# Altium PCB base_tiempo.PcbDoc
Units mil, origin at the board's own origin, x right, y up, seen from the top; angles counter-clockwise.
Board outline 6000 x 4000 mil, 2 copper layers (Top Layer, Bottom Layer); 15 components, 22 nets, 88 pads, 0 vias.
Unrouted connection lines stored in the file: 51.
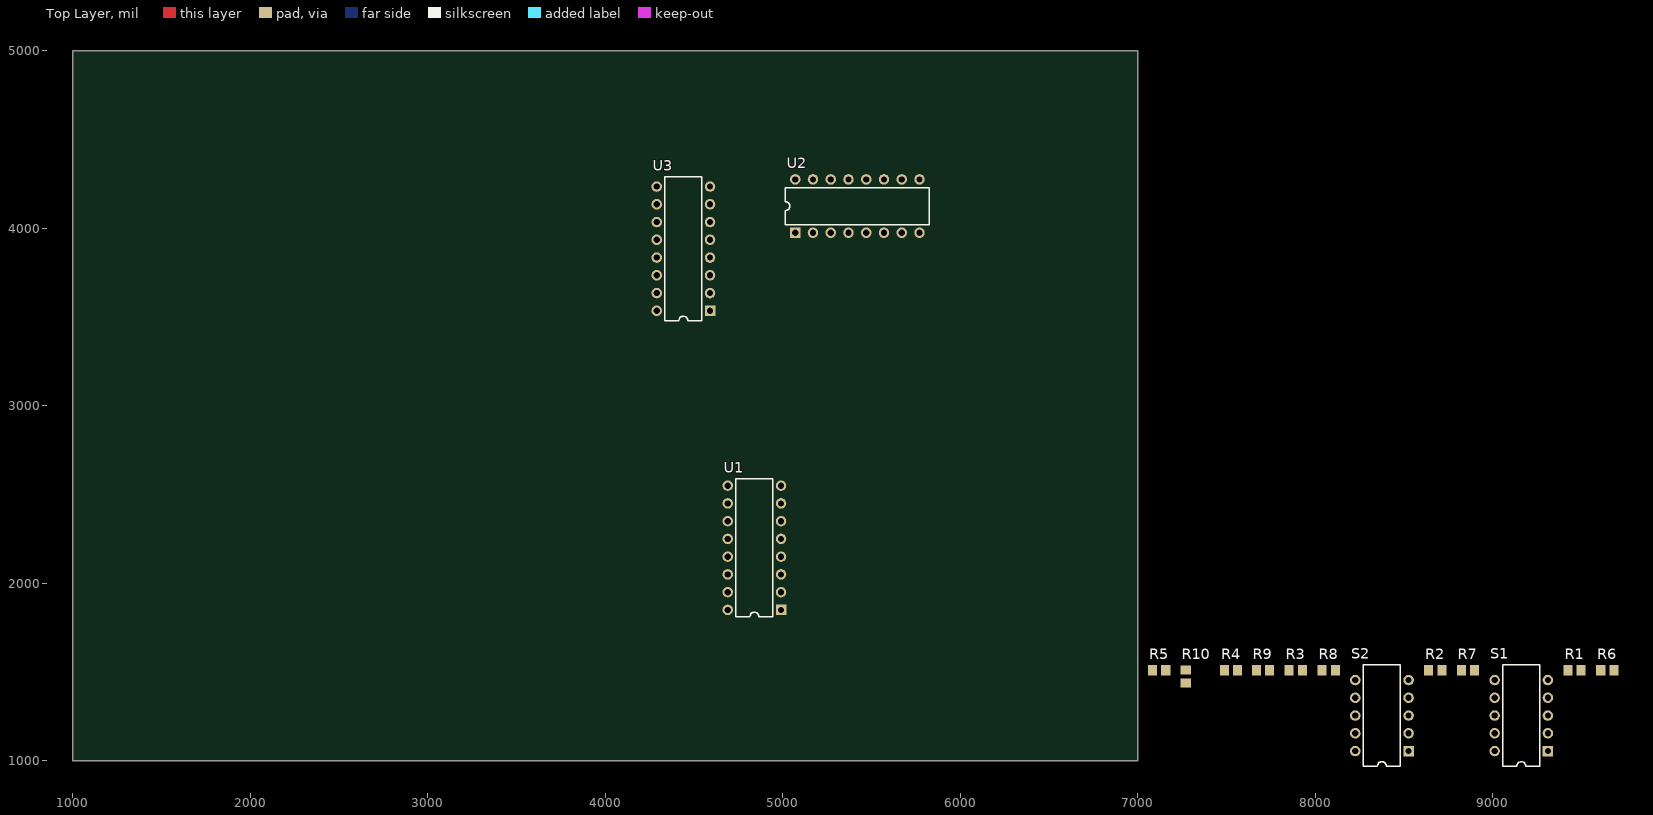
[diagram p0: Top Layer view]
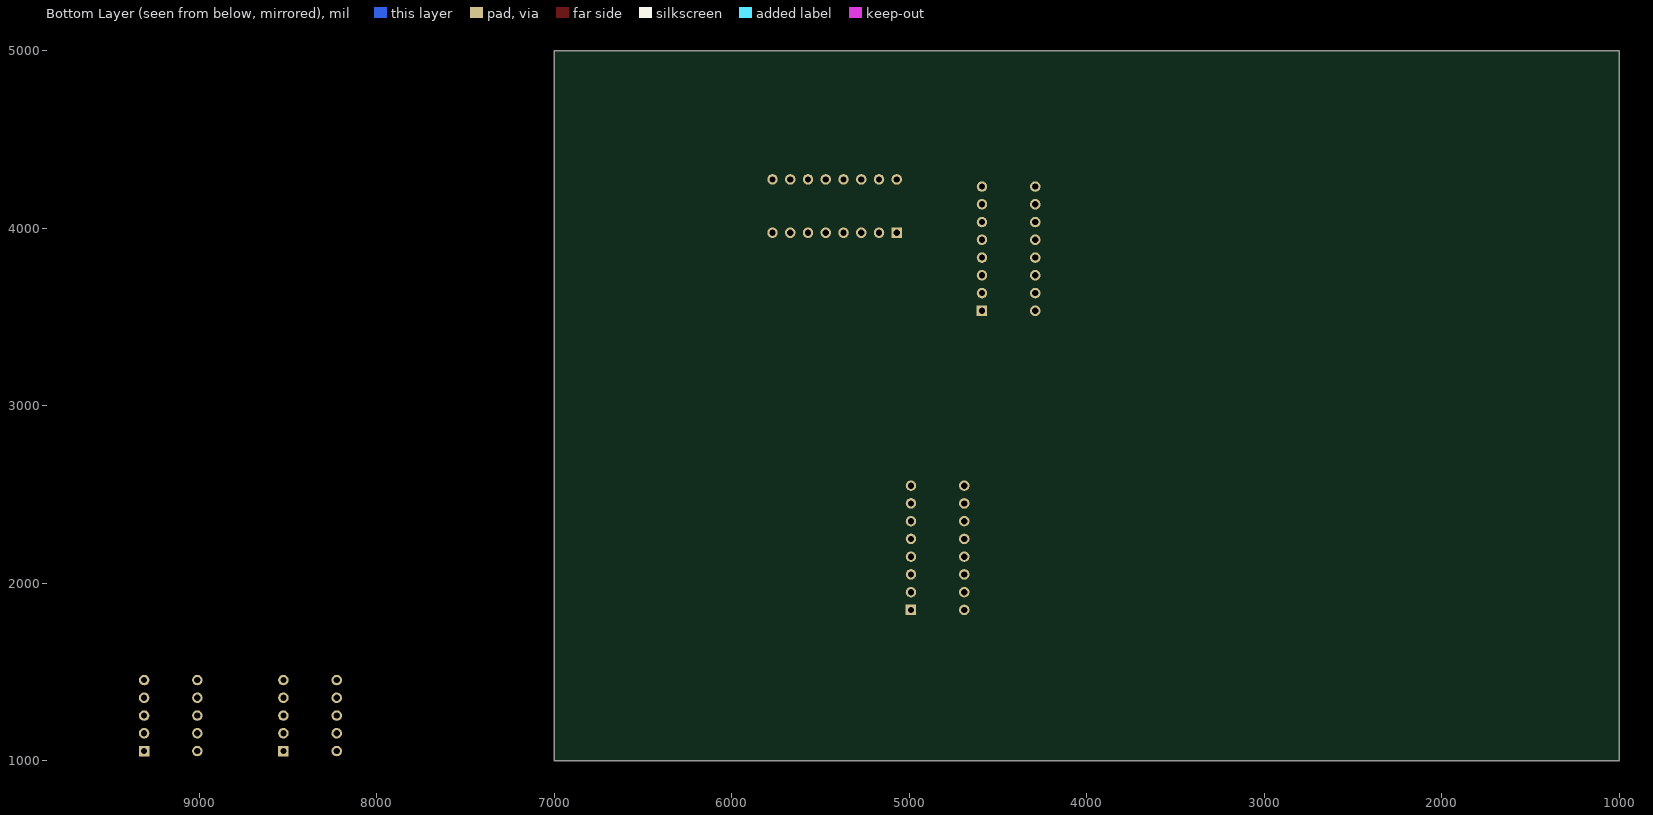
[diagram p1: Bottom Layer view, seen from below]

## Layer stack, top to bottom
Top Layer: signal copper 1.4
Dielectric: dielectric 12.6, FR-4, Dk 4.8
Bottom Layer: signal copper 1.4

## Board outline
1000,1000 7000,1000 7000,5000 1000,5000

## Design rules (kind name [scope] priority, off if disabled: settings)
Clearance [All] p1: gap=10
PolygonConnect [All] p1: connectstyle=Relief reliefconductorwidth=10 reliefentries=4 polygonreliefangle="90 Angle"
RoomDefinition Selector [InComponentClass('Selector')] p1: confinementstyle=ConfineIn formatcopy=TRUE lockcomponents=FALSE outline 7045,960 9720,960 9720,1650 7045,1650
RoomDefinition Buffer_5Bits [InComponentClass('Buffer_5Bits')] p2: confinementstyle=ConfineIn formatcopy=TRUE lockcomponents=FALSE outline 520,1105 2520,1105 2520,2105 520,2105
RoomDefinition base_tiempo [InComponentClass('base_tiempo')] p3: confinementstyle=ConfineIn formatcopy=TRUE lockcomponents=FALSE outline 7045,960 7845,960 7845,1860 7045,1860
RoutingVias [All] p1: holewidth=28 width=50 viastyle="Through Hole" minholewidth=28 minwidth=50 maxholewidth=28 maxwidth=50
SilkscreenOverComponentPads [All] p1: minsilkscreentomaskgap=10
SolderMaskExpansion [All] p1: expansion=4
TestPointUsage [All] p1: valid=0 allowmultiple=FALSE
Testpoint [All] p1: side=15 testpointundercomponent=TRUE minsize=40 maxsize=100 preferedsize=60 minholesize=0 maxholesize=40 preferedholesize=32 testpointgrid=1 style=1023 order=0-112345678
Width [All] p1: maxlimit=10 minlimit=10 preferedwidth=10
23 further rules are at their usual default settings.

## Classes and differential pairs
component class base_tiempo: U1
component class Buffer_5Bits: U2 U3
component class Selector: R1 R2 R3 R4 R5 R6 R7 R8 R9 R10 S1 S2

## Components (designator, comment, footprint, x,y, rotation, side; value= is the part's Value field where it differs from the comment)
R1 "Res Semi" 2012[0805] 9460,1510 r0 top
R2 "Res Semi" 2012[0805] 8675,1510 r0 top
R3 "Res Semi" 2012[0805] 7890,1510 r0 top
R4 "Res Semi" 2012[0805] 7525,1510 r0 top
R5 "Res Semi" 2012[0805] 7120,1510 r0 top
R6 "Res Semi" 2012[0805] 9645,1510 r0 top
R7 "Res Semi" 2012[0805] 8860,1510 r0 top
R8 "Res Semi" 2012[0805] 8075,1510 r0 top
R9 "Res Semi" 2012[0805] 7705,1510 r0 top
R10 "Res Semi" 2012[0805] 7270,1475 r90 top
S1 "SW DIP-5" N10A 9160,1255 r90 top
S2 "SW DIP-5" N10A 8375,1255 r90 top
U1 "SN74HC4040N" N016 4840,2200 r90 top
U2 "M54HC4050F1R" DIP16 5420,4125 r0 top
U3 "M54HC4049F1R" DIP16 4440,3885 r90 top

## Footprints (in the part's own frame and the unit in brackets; to place one, negate y for a bottom-side part, rotate by r counter-clockwise, add the part's x,y. Pads: shape width x height; smd on the part's side, far side on the other; paste and mask are expansions set on the pad)
2012[0805] [mm] "Chip Resistor; Body 2.0 x 1.3 mm (LxW typ)"
  rect 1.3x1.5 smd: 1(-0.95,0) 2(0.95,0)
DIP16 [mm] "DIP; 16 Leads; Row Spacing 7.62 mm; Pitch 2.54 mm"
  rect 1.5x1.5 hole 0.9: 1(-8.89,-3.81)
  round 1.5 hole 0.9: 2(-6.35,-3.81) 3(-3.81,-3.81) 4(-1.27,-3.81) 5(1.27,-3.81) 6(3.81,-3.81) 7(6.35,-3.81) 8(8.89,-3.81) 9(8.89,3.81) 10(6.35,3.81) 11(3.81,3.81) 12(1.27,3.81) 13(-1.27,3.81) 14(-3.81,3.81) 15(-6.35,3.81) 16(-8.89,3.81)
  silkscreen extent -10.3,-2.65 10.3,2.65
N10A [mm] "DIP; 10 Leads; Row Spacing 7.62 mm; Pitch 2.54 mm"
  rect 1.5x1.5 hole 0.9: 1(-5.08,-3.81)
  round 1.5 hole 0.9: 2(-2.54,-3.81) 3(0,-3.81) 4(2.54,-3.81) 5(5.08,-3.81) 6(5.08,3.81) 7(2.54,3.81) 8(0,3.81) 9(-2.54,3.81) 10(-5.08,3.81)
  silkscreen extent -7.25,-2.65 7.25,2.65
N016 [mm] "DIP; 16 Leads; Row Spacing 7.62 mm; Pitch 2.54 mm"
  rect 1.5x1.5 hole 0.9: 1(-8.89,-3.81)
  round 1.5 hole 0.9: 2(-6.35,-3.81) 3(-3.81,-3.81) 4(-1.27,-3.81) 5(1.27,-3.81) 6(3.81,-3.81) 7(6.35,-3.81) 8(8.89,-3.81) 9(8.89,3.81) 10(6.35,3.81) 11(3.81,3.81) 12(1.27,3.81) 13(-1.27,3.81) 14(-3.81,3.81) 15(-6.35,3.81) 16(-8.89,3.81)
  silkscreen extent -9.85,-2.65 9.85,2.65

## Part data
R1 R2 R3 R4 R5 R6 R7 R8 R9 R10: "Semiconductor Resistor"
S1 S2: "DIP Switch, 5 Position, SPST"
U1: "12-Bit Asynchronous Binary Counter"
U2: "Hex Buffer/Converter Non-Inverting"
U3: "Hex Buffer/Converter Invertering"

## Nets (pads, with @x,y where several pads share a name; then routed paths per layer and width w, separated by ;. In a path a pad name is that pad's centre, name@x,y a point inside that pad or via, vN(x,y) a via of type N, cw(c..) or ccw(c..) an arc to the next point about the centre after c; other vN are vias at no path point)
/SEL_B_0: R1.2 S2.1 U3.2
/SEL_B_1: R2.2 S2.2 U3.4
/SEL_B_2: R3.2 S2.3 U3.6
/SEL_B_3: R4.2 S2.4 U3.10
/SEL_B_4: R5.2 S2.5 U3.12
B_0: U1.9 U2.3 U3.3
B_1: U1.7 U2.5 U3.5
B_2: U1.6 U2.7 U3.7
B_3: U1.5 U2.9 U3.9
B_4: U1.3 U2.11 U3.11
GND: R1.1 R2.1 R3.1 R4.1 R5.1 R6.1 R7.1 R8.1 R9.1 R10.1 U1.8 U2.8 U3.8
O_0: S1.10 S2.10
O_1: S1.9 S2.9
O_2: S1.8 S2.8
O_3: S1.7 S2.7
O_4: S1.6 S2.6
SEL_B_0: R6.2 S1.1 U2.2
SEL_B_1: R7.2 S1.2 U2.4
SEL_B_2: R8.2 S1.3 U2.6
SEL_B_3: R9.2 S1.4 U2.10
SEL_B_4: R10.2 S1.5 U2.12
VCC: U1.10 U1.11 U1.16 U2.1 U3.1
pads on no net: U1.1 U1.2 U1.4 U1.12 U1.13 U1.14 U1.15 U2.13 U2.14 U2.15 U2.16 U3.13 U3.14 U3.15 U3.16